# EAGLE board LEDDriverSFE002 (EAGLE 6.2)
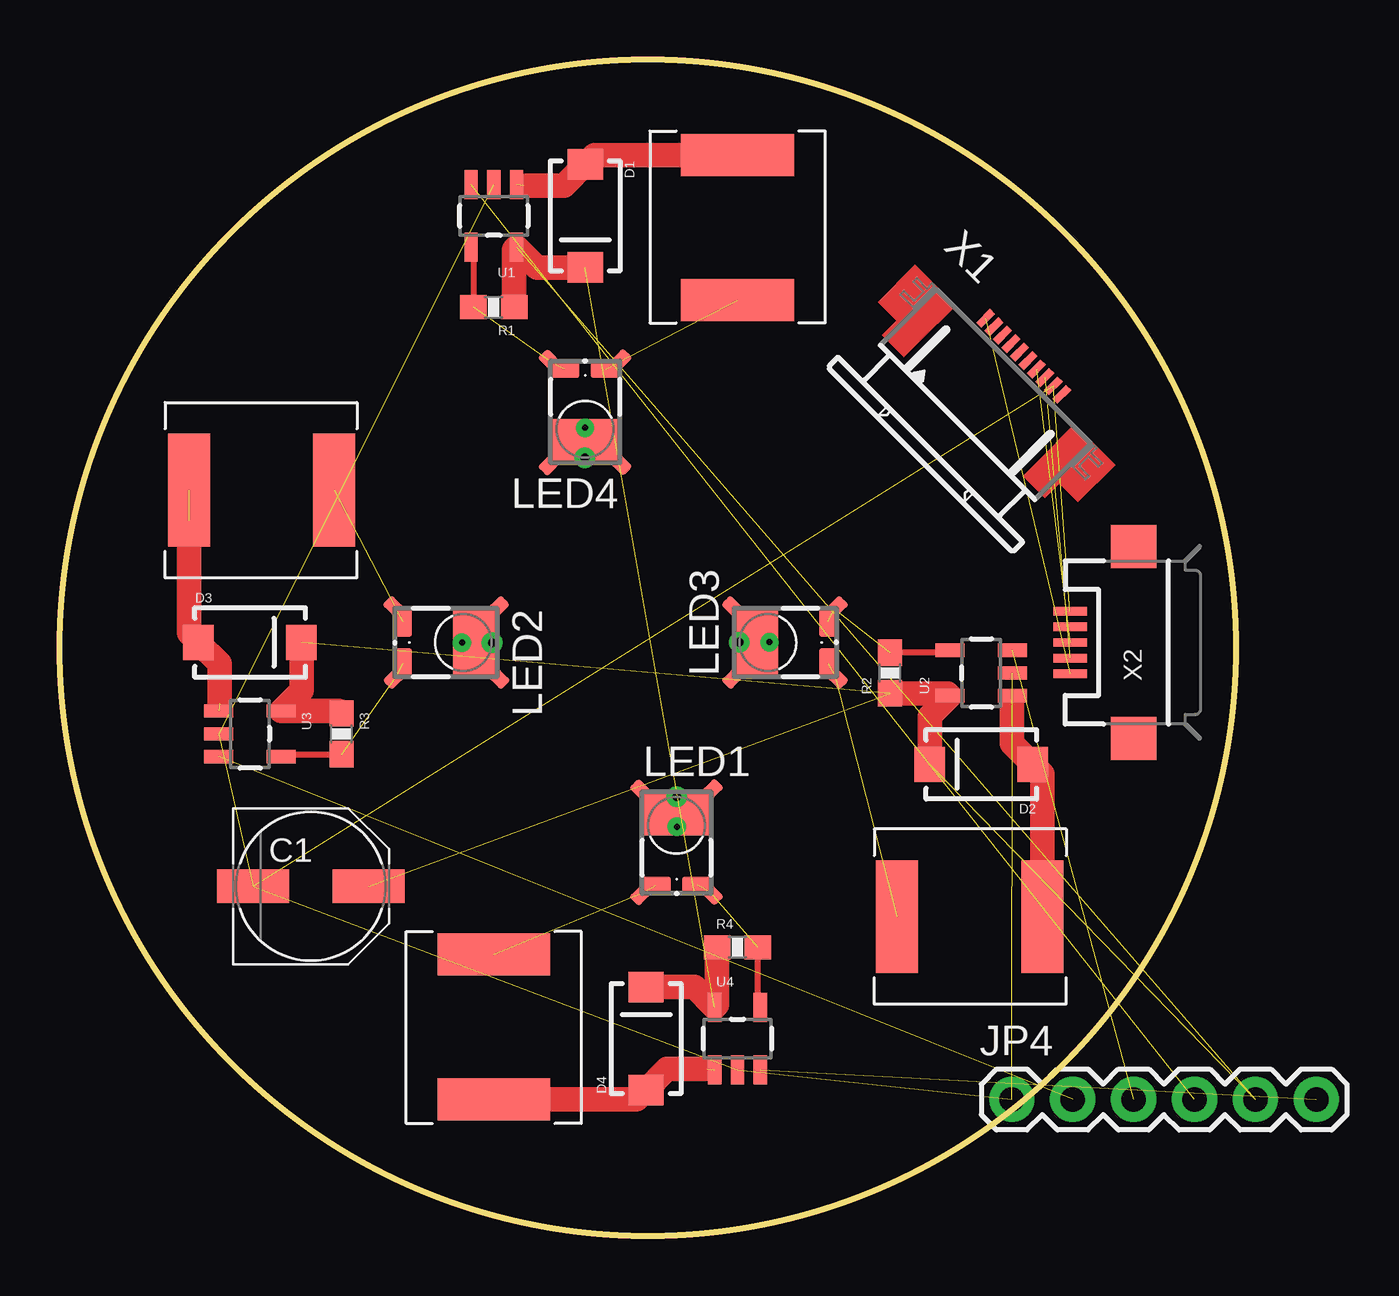
[diagram p0: board, top side]

Size 49 x 49 mm. Coordinates in mm from the lower left corner, seen from the top.
Outline: circle at 24.5,24.5 radius 24.5
Copper layers (1*16): Top 0.035mm / dielectric 1.5mm / Bottom 0.035mm
Design rules: minimum track width 10mil, minimum drill 24mil, track to track 8mil, track to pad 8mil, pad to pad 8mil, via to via 8mil, smd to smd 8mil, copper to edge 40mil, drill to drill 8mil, minimum pad ring 10mil, minimum via ring 8mil, stop-mask expansion 4mil, vias tented up to drill 0mil, thermal gap 10mil

## Footprints (pad centres in the part's own frame; a part is rotated, then mirrored left to right if it is on the bottom)
PANASONIC_D = smd 3 x 1.4: + 2.4,0; - -2.4,0
SMA-DIODE = smd 1.27 x 1.47: A -2.15,0; C 2.15,0
1X06 = drill 1.016 pad 1.88: 1 0,0; 2 2.54,0; 3 5.08,0; 4 7.62,0; 5 10.16,0; 6 12.7,0
CR75 = smd 1.75 x 4.7: P$1 0,0; P$2 6.05,0
LUXEON_REBEL = smd 1.26 x 0.73: A 0.87,-2.51; C -0.87,-2.51 | smd 1.1 x 0.57 rotated 315: A@1 1.39,-2.78 | smd 1.1 x 0.57 rotated 225: C@1 -1.39,-2.79 | smd 2.86 x 1.83: TH 0.01,0.49 | smd 1.1 x 0.57 rotated 135: TH@1 -1.39,1.37 | smd 1.1 x 0.57 rotated 45: TH@2 1.39,1.38 | drill 0.25 pad 0.35: TH@3 0.01,-0.06 | drill 0.35 pad 0.5: TH@4 0.01,1.2
0603-RES = smd 1.1 x 1: 1 -0.85,0; 2 0.85,0
SOT23-5 = smd 0.55 x 1.2: 1 -0.95,-1.3; 2 0,-1.3; 3 0.95,-1.3; 4 0.95,1.3; 5 -0.95,1.3
52745-1090 = smd 0.3 x 0.8: 1 -2.25,2.5; 2 -1.75,2.5; 3 -1.25,2.5; 4 -0.75,2.5; 5 -0.25,2.5; 6 0.25,2.5; 7 0.75,2.5; 8 1.25,2.5; 9 1.75,2.5; 10 2.25,2.5
USB-MICROB = smd 0.35 x 1.4: D+ 0,2.65; D- -0.65,2.65; GND 1.3,2.65; ID 0.65,2.65; VBUS -1.3,2.65 | smd 1.8 x 1.9: MT1 -4,0; MT2 4,0

## Placement (x,y rotation side)
C1  47uF, 35V  [PANASONIC_D]  10.46,14.56 0 top
D1  MBRA140  [SMA-DIODE]  21.89,42.5 270 top
D2  MBRA140  [SMA-DIODE]  38.4,19.64 180 top
D3  MBRA140  [SMA-DIODE]  7.92,24.72 0 top
D4  MBRA140  [SMA-DIODE]  24.43,8.21 90 top
JP4  [1X06]  39.67,5.67 0 top
L1  68uH  [CR75]  28.24,45.04 270 top
L2  68uH  [CR75]  40.94,13.29 180 top
L3  68uH  [CR75]  5.38,31.07 0 top
L4  68uH  [CR75]  18.08,5.67 90 top
LED1  LUXEON_REBEL  [LUXEON_REBEL]  25.7,17.1 0 top
LED2  LUXEON_REBEL  [LUXEON_REBEL]  16.81,24.72 270 top
LED3  LUXEON_REBEL  [LUXEON_REBEL]  29.51,24.72 90 top
LED4  LUXEON_REBEL  [LUXEON_REBEL]  21.89,33.61 180 top
R1  0.15  [0603-RES]  18.08,38.69 180 top
R2  0.15  [0603-RES]  34.59,23.45 90 top
R3  0.15  [0603-RES]  11.73,20.91 270 top
R4  0.15  [0603-RES]  28.24,12.02 0 top
U1  ZXLD1360  [SOT23-5]  18.08,42.5 180 top
U2  ZXLD1360  [SOT23-5]  38.4,23.45 90 top
U3  ZXLD1360  [SOT23-5]  7.92,20.91 270 top
U4  ZXLD1360  [SOT23-5]  28.24,8.21 0 top
X1  52745-1090  [52745-1090]  38.4,34.88 315 top
X2  USB-MICROB  [USB-MICROB]  44.75,24.72 90 top

## Library data of the parts
C1 D1-D4 L1-L4 R1-R4 U1-U4 = SparkFun
JP4 X2 = SparkFun-Connectors
LED1-LED4 = led
X1 = con-molex; MPN: 52745-1090; OC_FARNELL: unknown; OC_NEWARK: 92M6380

## Nets
ADJ1: JP4.4 U1.3
ADJ2: JP4.3 U2.3
ADJ3: JP4.2 U3.3
ADJ4: JP4.6 U4.3
D5: X1.3
D9: X1.5
D10: X1.4
D13: X1.2
D+IN: X1.7 X2.D+
D-IN: X1.8 X2.D-
GND: C1.- JP4.1 U1.2 U2.2 U3.2 U4.2 X1.9 X2.GND
N$1: L1.P$2 LED4.C LED4.C@1
N$2: D2.A L2.P$1 U2.1
N$3: LED3.A LED3.A@1 R2.2 U2.4
N$4: D1.A L1.P$1 U1.1
N$5: LED4.A LED4.A@1 R1.2 U1.4
N$6: L2.P$2 LED3.C LED3.C@1
N$7: D3.A L3.P$1 U3.1
N$8: LED2.A LED2.A@1 R3.2 U3.4
N$9: L3.P$2 LED2.C LED2.C@1
N$11: D4.A L4.P$1 U4.1
N$12: LED1.A LED1.A@1 R4.2 U4.4
N$13: L4.P$2 LED1.C LED1.C@1
TXLED: X1.6
UVCC: X1.1 X2.VBUS
VCC: X1.10
VIN: C1.+ D1.C D2.C D3.C D4.C JP4.5 R1.1 R2.1 R3.1 R4.1 U1.5 U2.5 U3.5 U4.5

## Tracks (layer width: path | path; a pad name or v marks a point on that pad's centre or on a via)
ADJ1  (1 unrouted)
ADJ2  (1 unrouted)
ADJ3  (1 unrouted)
ADJ4  (1 unrouted)
D+IN  (1 unrouted)
D-IN  (1 unrouted)
GND  (7 unrouted)
N$1  (2 unrouted)
N$2  (1 unrouted)
  Top 1.016: 39.67,22.18 39.67,20.52 D2.A 40.94,19.25 L2.P$1
N$3  (2 unrouted)
  Top 0.254: U2.4 37,24.3 R2.2
N$4  (1 unrouted)
  Top 1.016: 19.35,43.77 21.01,43.77 D1.A 22.28,45.04 L1.P$1
N$5  (2 unrouted)
  Top 0.254: U1.4 17.23,41.1 R1.2
N$6  (2 unrouted)
N$7  (2 unrouted)
  Top 1.016: 5.38,29.8 5.38,25.11 D3.A 6.65,23.84 6.65,22.18
N$8  (2 unrouted)
  Top 0.254: U3.4 9.32,20.06 R3.2
N$9  (2 unrouted)
N$11  (1 unrouted)
  Top 1.016: L4.P$1 24.04,5.67 D4.A 25.31,6.94 26.97,6.94
N$12  (2 unrouted)
  Top 0.254: U4.4 29.09,9.61 R4.2
N$13  (2 unrouted)
UVCC  (1 unrouted)
VIN  (5 unrouted)
  Top 1.016: D3.C 10.07,22.71 U3.5 11.63,21.86 R3.1 | R2.1 37,22.6 U2.5 36.25,21.65 D2.C | D1.C 19.88,40.35 U1.5 18.93,41.1 R1.1 | D4.C 26.44,10.36 U4.5 27.39,9.61 R4.1